# EAGLE board stencil2 (EAGLE 9.6.2), part 1 of 4
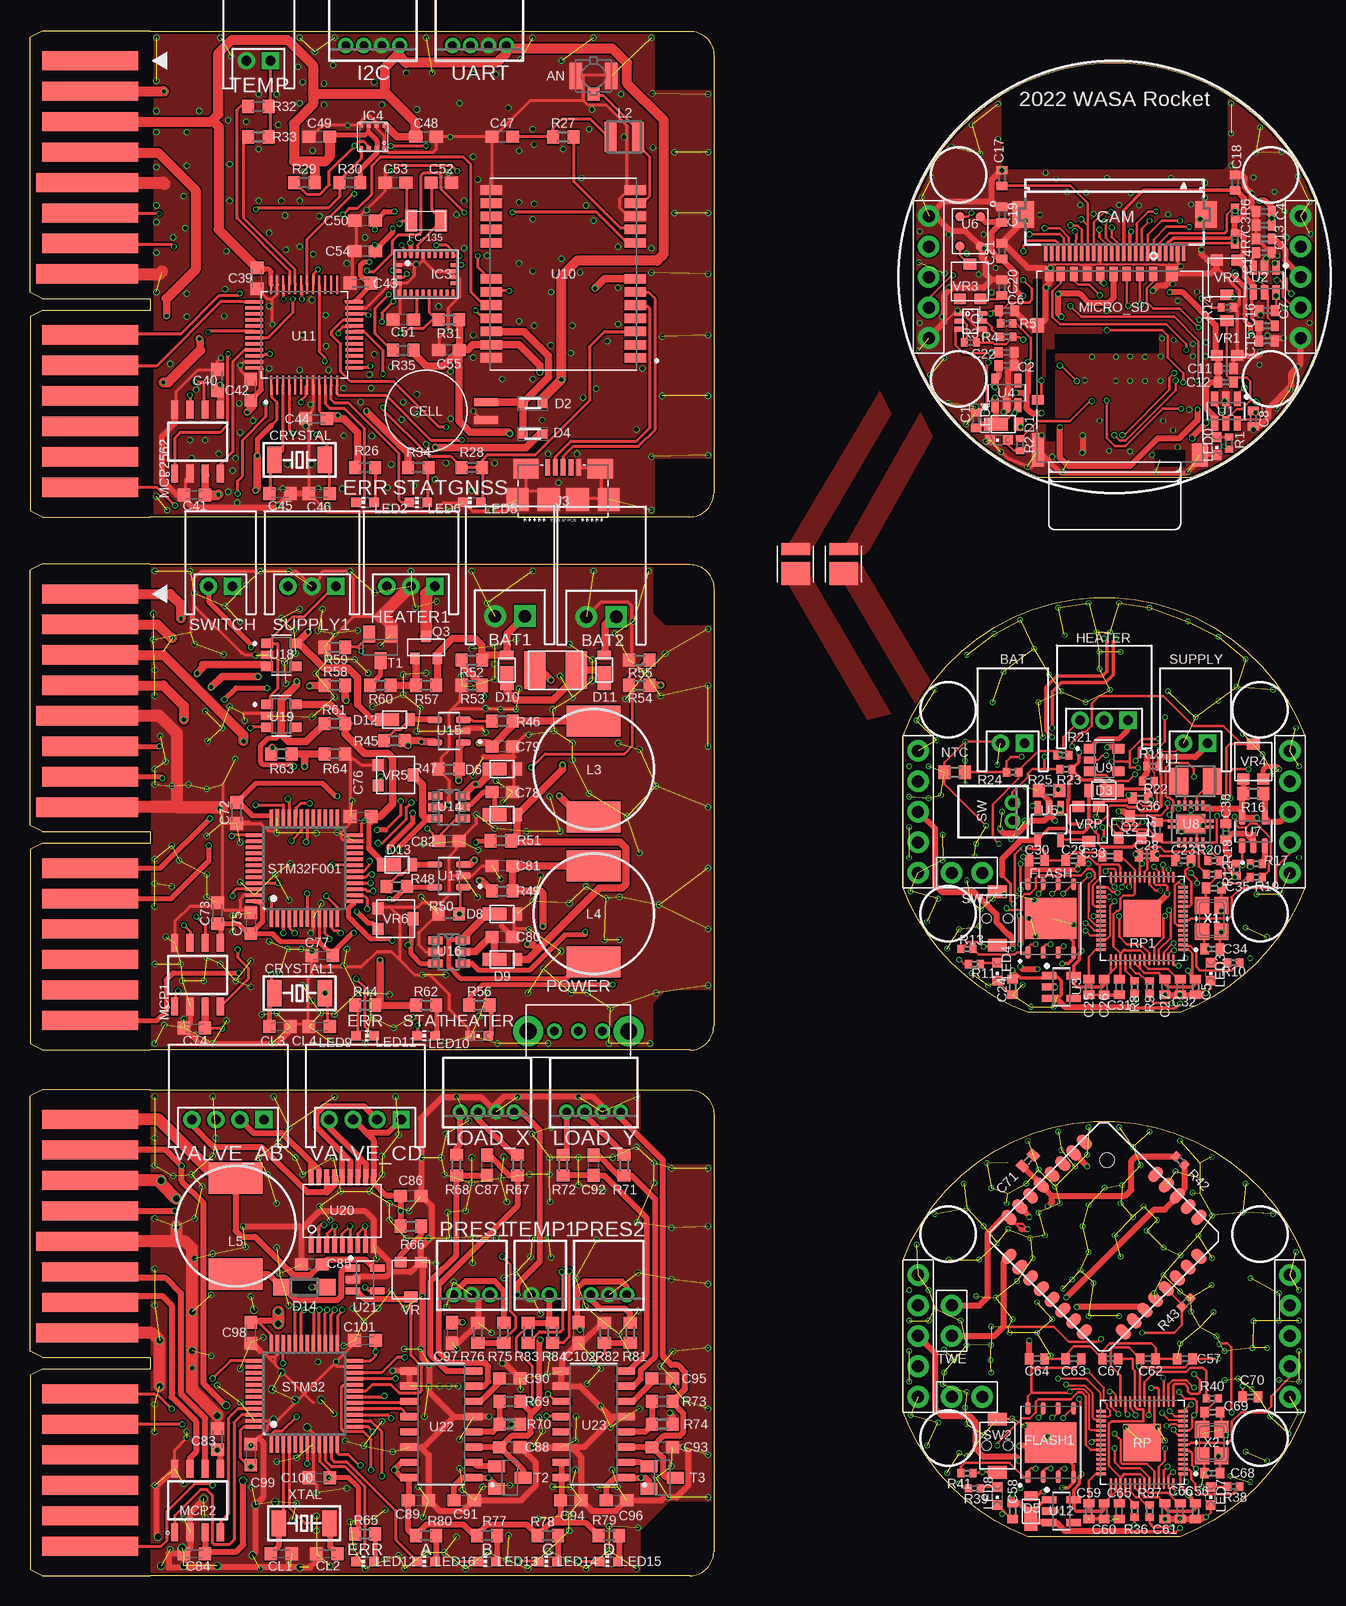
[diagram p0: board, top side]
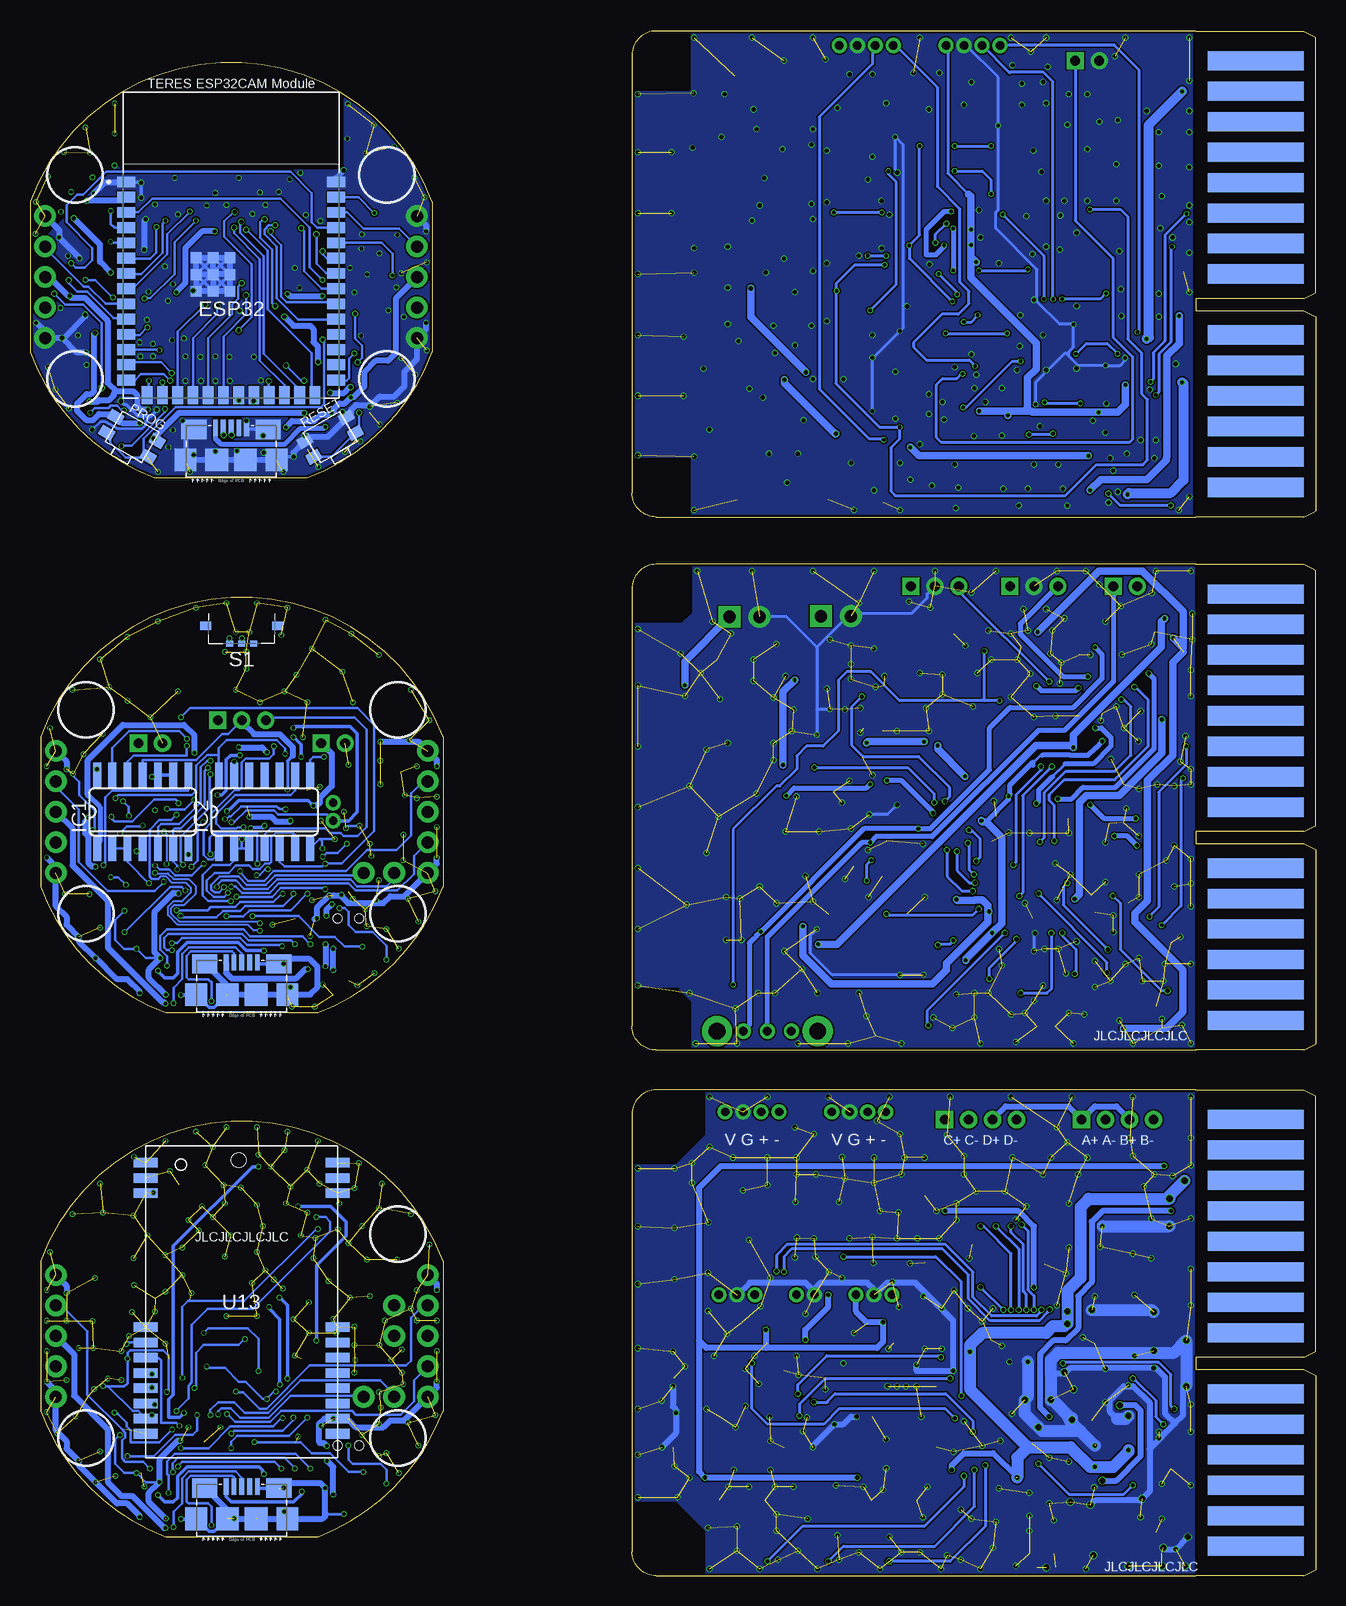
[diagram p1: board, bottom side, seen from below]

Size 107.19 x 128.76 mm. Coordinates in mm from the lower left corner, seen from the top.
Outline: 10,128.76 55,128.76 arc-90 57,126.77 57,90.27 arc-90 55,88.27 10,88.27
Outline: 10,84.31 55,84.31 arc-90 57,82.31 57,45.81 arc-90 55,43.81 10,43.81
Outline: 10,40.5 55,40.5 arc-90 57,38.5 57,2 arc-90 55,0 10,0
Outline: 107.19,114.54 107.19,101.99 arc-49 96.77,91.52 84.07,91.52 arc-49 73.66,101.99 73.66,114.54 arc-139 107.19,114.54
Outline: 106.3,69.96 106.3,57.41 arc-49 95.89,46.95 83.19,46.95 arc-49 72.77,57.41 72.77,69.96 arc-139 106.3,69.96
Outline: 106.3,26.27 106.3,13.72 arc-49 95.89,3.26 83.19,3.26 arc-49 72.77,13.72 72.77,26.27 arc-139 106.3,26.27
Copper layers (1*16): Top 0.035mm / dielectric 1.6mm / Bottom 0.035mm
Design rules "jlcpcb-2layers_": minimum track width 5mil, minimum drill 0.3mm, track to track 5mil, track to pad 5mil, pad to pad 5mil, via to via 5mil, smd to smd 5mil, copper to edge 0.2mm, drill to drill 6mil, minimum pad ring 10mil, minimum via ring 3mil, stop-mask expansion 4mil, vias tented up to drill 100mil, thermal gap 10mil

## Footprints (pad centres in the part's own frame; a part is rotated, then mirrored left to right if it is on the bottom)
S4B-PH-K-S = drill 0.8 square: 1 3,0 | drill 0.8: 2 1,0; 3 -1,0; 4 -3,0
U.FL_SMT = smd 1.05 x 2.2: GND1 -1.475,0; GND2 1.475,0 | smd 1 x 1.05: SIG 0,-1.525
S2B-PH-K-S = drill 0.8 square: 1 1,0 | drill 0.8: 2 -1,0
S2B-XH-A = drill 1.016 square: 1 1.25,0 | drill 1.016: 2 -1.25,0
P5_2.54 = drill 1: 1 0,5.08; 2 0,2.54; 3 0,0; 4 0,-2.54; 5 0,-5.08
C0402 = smd 0.7 x 0.9: 1 -0.65,0; 2 0.65,0
C0603K = smd 1.05 x 1.08: 1 -0.875,0; 2 0.875,0
C0603 = smd 1.1 x 1: 1 -0.85,0; 2 0.85,0
FH12-24S-0.5SH = smd 0.3 x 1.3: 1 -5.75,3.25; 2 -5.25,3.25; 3 -4.75,3.25; 4 -4.25,3.25; 5 -3.75,3.25; 6 -3.25,3.25; 7 -2.75,3.25; 8 -2.25,3.25; 9 -1.75,3.25; 10 -1.25,3.25; 11 -0.75,3.25; 12 -0.25,3.25; 13 0.25,3.25; 14 0.75,3.25; 15 1.25,3.25; 16 1.75,3.25; 17 2.25,3.25; 18 2.75,3.25; 19 3.25,3.25; 20 3.75,3.25; 21 4.25,3.25; 22 4.75,3.25; 23 5.25,3.25; 24 5.75,3.25 | smd 1.8 x 2.2: PAD1 -7.62,0; PAD2 7.62,0
DC,DCK = smd 0.7 x 2: + 0.75,-5; - -0.75,-5
FC-255 = smd 1.2 x 2.2: 1 -2.1,0; 2 2.1,0
CUHS20S30 = smd 0.8 x 1.1: A 1.25,0 | smd 2 x 1.1: C -0.65,0
SODFL1608X70N = smd 0.769 x 0.776: 1 -0.8,0; 2 0.8,0
SOD123 = smd 1.4 x 1.4: A 1.9,0; C -1.9,0
XCVR_ESP32-S3-WROOM-1-N16R2 = smd 1.5 x 0.9: 1 -8.75,5.26; 2 -8.75,3.99; 3 -8.75,2.72; 4 -8.75,1.45; 5 -8.75,0.18; 6 -8.75,-1.09; 7 -8.75,-2.36; 8 -8.75,-3.63; 9 -8.75,-4.9; 10 -8.75,-6.17; 11 -8.75,-7.44; 12 -8.75,-8.71; 13 -8.75,-9.98; 14 -8.75,-11.25; 27 8.75,-11.25; 28 8.75,-9.98; 29 8.75,-8.71; 30 8.75,-7.44; 31 8.75,-6.17; 32 8.75,-4.9; 33 8.75,-3.63; 34 8.75,-2.36; 35 8.75,-1.09; 36 8.75,0.18; 37 8.75,1.45; 38 8.75,2.72; 39 8.75,3.99; 40 8.75,5.26 | smd 0.9 x 1.5: 15 -6.985,-12.5; 16 -5.715,-12.5; 17 -4.445,-12.5; 18 -3.175,-12.5; 19 -1.905,-12.5; 20 -0.635,-12.5; 21 0.635,-12.5; 22 1.905,-12.5; 23 3.175,-12.5; 24 4.445,-12.5; 25 5.715,-12.5; 26 6.985,-12.5 | smd 0.9 x 0.9: 41_1 -1.5,-2.46; 41_2 -2.9,-2.46; 41_3 -0.1,-2.46; 41_4 -2.9,-3.86; 41_5 -1.5,-3.86; 41_6 -0.1,-3.86; 41_7 -2.9,-1.06; 41_8 -1.5,-1.06; 41_9 -0.1,-1.06
FC-135 = smd 1 x 1.8: P$1 0,0; P$2 2.5,0
SON127P600X500X80-9N = smd 1.04 x 0.44: 1 -2.845,1.905; 2 -2.845,0.635; 3 -2.845,-0.635; 4 -2.845,-1.905; 5 2.845,-1.905; 6 2.845,-0.635; 7 2.845,0.635; 8 2.845,1.905 | smd 3.4 x 4.3: 9 0,0
S3B-PH-K-S = drill 0.8 square: 1 2,0 | drill 0.8: 2 0,0; 3 -2,0
S4B-ZR = drill 0.7 pad 1.1: 1 -2.25,0; 2 -0.75,0; 3 0.75,0; 4 2.25,0
SO14 = smd 0.66 x 2.032: 1 -3.81,-3.073; 2 -2.54,-3.073; 3 -1.27,-3.073; 4 0,-3.073; 5 1.27,-3.073; 6 2.54,-3.073; 7 3.81,-3.073; 8 3.81,3.073; 9 2.54,3.073; 10 1.27,3.073; 11 0,3.073; 12 -1.27,3.073; 13 -2.54,3.073; 14 -3.81,3.073
LGA-28_3.80X5.20/0.5 = smd 0.3 x 0.5: 1 -2.25,1.56; 6 -2.25,-1.56; 7 -1.75,-1.56; 8 -1.25,-1.56; 9 -0.75,-1.56; 10 -0.25,-1.56; 11 0.25,-1.56; 12 0.75,-1.56; 13 1.25,-1.56; 14 1.75,-1.56; 15 2.25,-1.56; 20 2.25,1.56; 21 1.75,1.56; 22 1.25,1.56; 23 0.75,1.56; 24 0.25,1.56; 25 -0.25,1.56; 26 -0.75,1.56; 27 -1.25,1.56; 28 -1.75,1.56 | smd 0.5 x 0.3: 2 -2.25,0.75; 3 -2.25,0.25; 4 -2.25,-0.25; 5 -2.25,-0.75; 16 2.25,-0.75; 17 2.25,-0.25; 18 2.25,0.25; 19 2.25,0.75
BME280 = smd 0.35 x 0.5: 1 0.975,-1.025; 2 0.325,-1.025; 3 -0.325,-1.025; 4 -0.975,-1.025; 5 -0.975,1.025; 6 -0.325,1.025; 7 0.325,1.025; 8 0.975,1.025
GHI-CONNECTORS_10118192-0001LF(MICRO-USB-B-AMPHENOL-FCI) = smd 1.8 x 1.9: CGND1 -3.8,0; CGND4 3.8,0 | smd 1.9 x 1.9: CGND2 -1.2,0; CGND3 1.2,0 | smd 2.1 x 1.6: CGND5 3.1,2.55; CGND6 -3.1,2.55 | smd 0.4 x 1.35: D+ 0,2.675; D- -0.65,2.675; GND 1.3,2.675; ID 0.65,2.675; VBUS -1.3,2.675
L3225M = smd 1.6 x 2.2: 1 -1.4,0; 2 1.4,0
SM-NE29 = smd 1 x 2.54: 1 -1.15,0; 2 1.15,0
NR10050 = smd 2.6 x 4.5: 1 -4,0; 2 4,0
CHIPLED_0603 = smd 0.8 x 0.8: A 0,-0.75; C 0,0.75
CHIP-LED0603 = smd 0.8 x 0.8: A 0,-0.75; C 0,0.75
SOIC127P600X175-8N = smd 1.5 x 0.6: 1 -2.65,1.905; 2 -2.65,0.635; 3 -2.65,-0.635; 4 -2.65,-1.905; 5 2.65,-1.905; 6 2.65,-0.635; 7 2.65,0.635; 8 2.65,1.905
HRS_DM3AT-SF-PEJM5 = smd 0.7 x 1.2: 1 3.2,0; 2 2.1,0; 3 1,0; 4 -0.1,0; 5 -1.2,0; 6 -2.3,0; 7 -3.4,0; 8 -4.5,0; SWB -5.45,0 | smd 1 x 1.2: P1 -6.4,-4.3; P4 4.75,0 | smd 1 x 2.8: P2 -6.4,-14.65 | smd 1.3 x 1.9: P3 7.1,-15.1 | smd 1 x 0.8: SWA -6.4,-10.5
R0603 = smd 1 x 1.1: 1 -0.85,0; 2 0.85,0
SK-12D01-VG4 = drill 1.4 pad 1.93: 1 -4.2,0; 2 4.2,0 | drill 0.7: A -2,0; B 2,0; C 0,0
S3B-ZR = drill 0.7 pad 1.1: 1 -1.5,0; 2 0,0; 3 1.5,0
THAF01-NC-R = smd 1.2 x 0.9: 1 -2,0.75; 2 2,0.75; 3 -2,-0.75; 4 2,-0.75
SOT-363 = smd 0.4 x 0.8: 1 -0.65,-0.95; 2 0,-0.95; 3 0.65,-0.95; 4 0.65,0.95; 5 0,0.95; 6 -0.65,0.95
SOT-23 = smd 0.802 x 0.972: P1 -0.95,-0.917; P2 0.95,-0.917; P3 0,0.917
R0402 = smd 0.6 x 0.7: 1 -0.5,0; 2 0.5,0
QFN40P700X700X90-57N = smd 0.84 x 0.2: 1 -3.435,2.6; 2 -3.435,2.2; 3 -3.435,1.8; 4 -3.435,1.4; 5 -3.435,1; 6 -3.435,0.6; 7 -3.435,0.2; 8 -3.435,-0.2; 9 -3.435,-0.6; 10 -3.435,-1; 11 -3.435,-1.4; 12 -3.435,-1.8; 13 -3.435,-2.2; 14 -3.435,-2.6; 29 3.435,-2.6; 30 3.435,-2.2; 31 3.435,-1.8; 32 3.435,-1.4; 33 3.435,-1; 34 3.435,-0.6; 35 3.435,-0.2; 36 3.435,0.2; 37 3.435,0.6; 38 3.435,1; 39 3.435,1.4; 40 3.435,1.8; 41 3.435,2.2; 42 3.435,2.6 | smd 0.2 x 0.84: 15 -2.6,-3.435; 16 -2.2,-3.435; 17 -1.8,-3.435; 18 -1.4,-3.435; 19 -1,-3.435; 20 -0.6,-3.435; 21 -0.2,-3.435; 22 0.2,-3.435; 23 0.6,-3.435; 24 1,-3.435; 25 1.4,-3.435; 26 1.8,-3.435; 27 2.2,-3.435; 28 2.6,-3.435; 43 2.6,3.435; 44 2.2,3.435; 45 1.8,3.435; 46 1.4,3.435; 47 1,3.435; 48 0.6,3.435; 49 0.2,3.435; 50 -0.2,3.435; 51 -0.6,3.435; 52 -1,3.435; 53 -1.4,3.435; 54 -1.8,3.435; 55 -2.2,3.435; 56 -2.6,3.435 | smd 3.1 x 3.1: 57 0,0
SSAJ120100 = smd 0.6 x 0.51: 1 -1,2.5; 2 1,2.5; C 0,2.5 | smd 0.9 x 0.7: GND@1 -3,1; GND@2 3,1
LQFP48 = smd 1.5 x 0.3: 1 -4.15,2.75; 2 -4.15,2.25; 3 -4.15,1.75; 4 -4.15,1.25; 5 -4.15,0.75; 6 -4.15,0.25; 7 -4.15,-0.25; 8 -4.15,-0.75; 9 -4.15,-1.25; 10 -4.15,-1.75; 11 -4.15,-2.25; 12 -4.15,-2.75; 25 4.15,-2.75; 26 4.15,-2.25; 27 4.15,-1.75; 28 4.15,-1.25; 29 4.15,-0.75; 30 4.15,-0.25; 31 4.15,0.25; 32 4.15,0.75; 33 4.15,1.25; 34 4.15,1.75; 35 4.15,2.25; 36 4.15,2.75 | smd 0.3 x 1.5: 13 -2.75,-4.15; 14 -2.25,-4.15; 15 -1.75,-4.15; 16 -1.25,-4.15; 17 -0.75,-4.15; 18 -0.25,-4.15; 19 0.25,-4.15; 20 0.75,-4.15; 21 1.25,-4.15; 22 1.75,-4.15; 23 2.25,-4.15; 24 2.75,-4.15; 37 2.75,4.15; 38 2.25,4.15; 39 1.75,4.15; 40 1.25,4.15; 41 0.75,4.15; 42 0.25,4.15; 43 -0.25,4.15; 44 -0.75,4.15; 45 -1.25,4.15; 46 -1.75,4.15; 47 -2.25,4.15; 48 -2.75,4.15
S2B-ZR = drill 0.7 pad 1.1: 1 -0.75,0; 2 0.75,0
TVAF06-A020B-R = smd 1.6 x 1.05: P$1 0,2.225; P$2 0,-2.225 | hole 0.75: -0.9,0; 0.9,0
SOT23-EBC = smd 1 x 1.4: B 0.95,-1.1; C 0,1.1; E -0.95,-1.1
SOT23-BEC = smd 1 x 1.4: B -0.95,-1.1; C 0,1.1; E 0.95,-1.1
P2_2.54 = drill 1: P$1 0,1.27; P$2 0,-1.27
SOT95P240X110-6N = smd 1.18 x 0.609: 1 -1.024,0.95; 2 -1.024,0; 3 -1.024,-0.95; 4 1.024,-0.95; 5 1.024,0; 6 1.024,0.95
SOT95P240X110-5N = smd 1.18 x 0.609: 1 -1.024,0.95; 2 -1.024,0; 3 -1.024,-0.95; 4 1.024,-0.95; 5 1.024,0.95
SOT23-5L = smd 0.533 x 1.2: 1 -0.95,-1.3; 2 0,-1.3; 3 0.95,-1.3 | smd 0.55 x 1.2: 4 0.95,1.3; 5 -0.95,1.3
SPU0414HR5H-SB = smd 0.8 x 0.8: 1 0.85,1.23; 2 0.85,-1.23; 3 -0.85,-1.23; 4 -0.85,1.23
SOT95P280X100-5N_LT6106CS5#PBF = smd 1.24 x 0.55: 1 -1.185,0.95; 2 -1.185,0; 3 -1.185,-0.95; 4 1.185,-0.95; 5 1.185,0.95
10-VFDFN = smd 0.85 x 0.28: 1 -1.55,1; 2 -1.55,0.5; 3 -1.55,0; 4 -1.55,-0.5; 5 -1.55,-1; 6 1.55,-1; 7 1.55,-0.5; 8 1.55,0; 9 1.55,0.5; 10 1.55,1 | smd 1.65 x 2.4: P$1 0,0 | smd 0.28 x 0.7: P$2 -0.25,1.55; P$3 0.25,1.55; P$4 -0.25,-1.55; P$5 0.25,-1.55
IC_TCK106AF,LF = smd 1 x 0.8: 1 -1.2,0.95; 3 -1.2,-0.95; 4 1.2,-0.95; 5 1.2,0.95 | smd 1 x 0.6: 2 -1.2,0
XCVR_NEO-M9N-00B = smd 1.8 x 0.8: 1 -6,7; 2 -6,5.9; 3 -6,4.8; 4 -6,3.7; 5 -6,2.6; 6 -6,1.5; 7 -6,0.4; 8 -6,-2.6; 9 -6,-3.7; 10 -6,-4.8; 11 -6,-5.9; 12 -6,-7; 13 6,-7; 14 6,-5.9; 15 6,-4.8; 16 6,-3.7; 17 6,-2.6; 18 6,0.4; 19 6,1.5; 20 6,2.6; 21 6,3.7; 22 6,4.8; 23 6,5.9; 24 6,7
QFP50P900X900X160-48N = smd 1.56 x 0.28: 1 -4.18,2.75; 2 -4.18,2.25; 3 -4.18,1.75; 4 -4.18,1.25; 5 -4.18,0.75; 6 -4.18,0.25; 7 -4.18,-0.25; 8 -4.18,-0.75; 9 -4.18,-1.25; 10 -4.18,-1.75; 11 -4.18,-2.25; 12 -4.18,-2.75; 25 4.18,-2.75; 26 4.18,-2.25; 27 4.18,-1.75; 28 4.18,-1.25; 29 4.18,-0.75; 30 4.18,-0.25; 31 4.18,0.25; 32 4.18,0.75; 33 4.18,1.25; 34 4.18,1.75; 35 4.18,2.25; 36 4.18,2.75 | smd 0.28 x 1.56: 13 -2.75,-4.18; 14 -2.25,-4.18; 15 -1.75,-4.18; 16 -1.25,-4.18; 17 -0.75,-4.18; 18 -0.25,-4.18; 19 0.25,-4.18; 20 0.75,-4.18; 21 1.25,-4.18; 22 1.75,-4.18; 23 2.25,-4.18; 24 2.75,-4.18; 37 2.75,4.18; 38 2.25,4.18; 39 1.75,4.18; 40 1.25,4.18; 41 0.75,4.18; 42 0.25,4.18; 43 -0.25,4.18; 44 -0.75,4.18; 45 -1.25,4.18; 46 -1.75,4.18; 47 -2.25,4.18; 48 -2.75,4.18
E220-900T22S = smd 2 x 0.8: P1 8,-11.6; P2 8,-10.33; P3 8,-9.06; P4 8,2.11; P5 8,3.38; P6 8,4.65; P7 8,5.92; P8 8,7.19; P9 8,8.46; P10 8,9.73; P11 8,11; P12 -8,11; P13 -8,9.73; P14 -8,8.46; P15 -8,7.19; P16 -8,5.92; P17 -8,4.65; P18 -8,3.38; P19 -8,2.11; P20 -8,-9.06; P21 -8,-10.33; P22 -8,-11.6
SOT-6_S = smd 1.219 x 0.66: 1 -1.143,0.95; 2 -1.143,0; 3 -1.143,-0.95; 4 1.143,-0.95; 5 1.143,0; 6 1.143,0.95
SSOP18-P-225-0.65 = smd 1.35 x 0.4: P1 -2.8,2.6; P2 -2.8,1.95; P3 -2.8,1.3; P4 -2.8,0.65; P5 -2.8,0; P6 -2.8,-0.65; P7 -2.8,-1.3; P8 -2.8,-1.95; P9 -2.8,-2.6; P10 2.8,-2.6; P11 2.8,-1.95; P12 2.8,-1.3; P13 2.8,-0.65; P14 2.8,0; P15 2.8,0.65; P16 2.8,1.3; P17 2.8,1.95; P18 2.8,2.6
SOP127P600X180-16N = smd 1.58 x 0.59: 1 -2.67,4.445; 2 -2.67,3.175; 3 -2.67,1.905; 4 -2.67,0.635; 5 -2.67,-0.635; 6 -2.67,-1.905; 7 -2.67,-3.175; 8 -2.67,-4.445; 9 2.67,-4.445; 10 2.67,-3.175; 11 2.67,-1.905; 12 2.67,-0.635; 13 2.67,0.635; 14 2.67,1.905; 15 2.67,3.175; 16 2.67,4.445
EDGE30 = smd 1.6 x 8: 1 -17.78,-5; 2 -15.24,-5; 3 -12.7,-5; 4 -10.16,-5; 6 -5.08,-5; 7 -2.54,-5; 10 5.08,-5; 11 7.62,-5; 12 10.16,-5; 13 12.7,-5; 14 15.24,-5; 15 17.78,-5 | smd 1.6 x 8.5: 5 -7.62,-5.25; 8 0,-5.25 | smd 1.6 x 8 bottom: 16 -17.78,-5; 17 -15.24,-5; 18 -12.7,-5; 19 -10.16,-5; 20 -7.62,-5; 21 -5.08,-5; 22 -2.54,-5; 23 0,-5; 25 5.08,-5; 26 7.62,-5; 27 10.16,-5; 28 12.7,-5; 29 15.24,-5; 30 17.78,-5
S1S0-3030XX9506 = smd 1.01 x 2.37: A 1.245,0 | smd 1.93 x 2.37: C -0.785,0
LITE = smd 1.4 x 0.9: 1 0.25,11.43; 2 0.25,10.16; 3 0.25,8.89; 4 0.25,7.62; 5 0.25,6.35; 6 0.25,5.08; 7 0.25,3.81; 8 0.25,2.54; 17 13.72,2.54; 18 13.72,3.81; 19 13.72,5.08; 20 13.72,6.35; 21 13.72,7.62; 22 13.72,8.89; 23 13.72,10.16; 24 13.72,11.43 | smd 0.9 x 1.4: 9 2.54,0.25; 10 3.81,0.25; 11 5.08,0.25; 12 6.35,0.25; 13 7.62,0.25; 14 8.89,0.25; 15 10.16,0.25; 16 11.43,0.25; 25 11.43,13.72; 26 10.16,13.72; 27 8.89,13.72; 28 7.62,13.72; 29 6.35,13.72 | hole 1.2: 2.65,11.7
SMD1812P = smd 1.78 x 3.15: 1 -1.725,0; 2 1.725,0
PVZ3A = smd 1 x 0.9: 1 -0.85,-1.45; 3 0.85,-1.45 | smd 1.1 x 0.9: 2 0,1.45
FA-238 = smd 1.4 x 1.2: 1 -1.1,-0.8; 2 1.1,-0.8; 3 1.1,0.8; 4 -1.1,0.8

## Placement (x,y rotation side)
AB  [S4B-PH-K-S]  16.51,38.03 0 top
AN  U.FL-R-SMT  [U.FL_SMT]  46.99,125.02 0 top
BAT  [S2B-PH-K-S]  81.91,69.4 0 top
BAT1  [S2B-XH-A]  40,79.99 0 top
BAT2  [S2B-XH-A]  47.62,79.94 0 top
BOTTOM  P5_2.54  [P5_2.54]  105.03,63.68 0 top
BOTTOM1  P5_2.54  [P5_2.54]  105.03,20 0 top
C1  0.1µF  [C0402]  78.87,96.32 90 top
C2  10µF  [C0402]  81.41,100.89 0 top
C3  22µF  [C0402]  102.87,112.58 180 top
C4  0.1µF  [C0402]  102.87,113.72 180 top
C5  0.1µ  [C0402]  97.16,49.08 270 top
C6  0.1µF  [C0402]  81.42,105.47 0 top
C7  0.1µF  [C0402]  103.12,105.47 180 top
C8  0.01µF  [C0402]  101.98,96.45 270 top
C9  P5_2.54  [P5_2.54]  74.92,108.26 0 top
C10  P5_2.54  [P5_2.54]  105.92,108.26 0 top
C11  2.2µF  [C0402]  99.69,100.64 0 top
C12  100pF  [C0402]  99.69,99.5 0 top
C13  0.1µF  [C0402]  102.87,111.44 180 top
C14  0.01µF  [C0402]  102.87,110.29 0 top
C15  1.0µF  [C0402]  103.12,102.93 0 top
C16  100pF  [C0402]  103.12,104.2 0 top
C17  15pF  [C0402]  81.03,116.52 90 top
C18  0.1µF  [C0402]  100.46,116.13 90 top
C19  0.1µF  [C0402]  81.03,113.47 90 top
C20  2.2µF  [C0402]  81.03,107.37 90 top
C21  10µF  [C0402]  81.03,110.42 90 top
C22  1µF  [C0402]  81.41,101.97 0 top
C23  0.1µ  [C0402]  96.14,59.62 180 top
C24  0.1µF  [C0402]  81.91,49.08 270 top
C25  10µF  [C0402]  88.27,49.08 270 top
C26  1µ  [C0402]  89.53,49.08 270 top
C27  0.1µ  [C0402]  94.61,49.08 270 top
C28  0.1µ  [C0402]  93.09,60 0 top
C29  0.1µ  [C0402]  87,59.62 180 top
C30  10µF  [C0402]  83.95,59.62 0 top
C31  1µ  [C0402]  90.8,49.08 270 top
C32  0.1µ  [C0402]  95.89,49.08 270 top
C33  0.1µ  [C0402]  90.04,60 180 top
C34  10p  [C0402]  98.55,52.25 180 top
C35  10p  [C0402]  98.68,57.32 0 top
C36  10µF  [C0402]  92.58,64.83 180 top
C37  0.1µF  [C0402]  93.98,62.16 90 top
C38  10µF  [C0402]  99.69,62.03 270 top
C39  [C0603K]  18.92,108.13 270 top
C40  [C0603K]  15.63,99.67 90 top
C41  [C0603K]  13.72,90.1 180 top
C42  [C0603K]  18.41,98.86 90 top
C43  [C0603K]  27.56,107.75 180 top
C44  [C0603K]  23.88,96.45 180 top
C45  15pF  [C0603K]  20.83,90.23 180 top
C46  15pF  [C0603K]  24.13,90.23 0 top
C47  47pF  [C0603]  39.37,119.94 180 top
C48  0.1µ  [C0603]  33.02,119.94 0 top
C49  0.1µ  [C0603]  24.13,119.94 180 top
C50  0.1µ  [C0603]  27.94,112.96 180 top
C51  0.1µ  [C0603]  31.12,104.7 180 top
C52  [C0603]  34.29,116.13 180 top
C53  [C0603]  30.48,116.13 0 top
C54  0.1µF  [C0603]  27.94,110.42 180 top
C55  0.1µ  [C0603]  34.92,102.16 180 top
C56  0.1µ  [C0402]  97.16,5.39 270 top
C57  0.1µ  [C0402]  96.27,18.09 180 top
C58  0.1µF  [C0402]  81.91,5.39 270 top
C59  10µF  [C0402]  88.27,5.39 270 top
C60  1µ  [C0402]  89.53,5.39 270 top
C61  0.1µ  [C0402]  94.61,5.39 270 top
C62  0.1µ  [C0402]  93.19,18.09 0 top
C63  0.1µ  [C0402]  87,18.09 180 top
C64  0.1μ  [C0402]  83.95,18.09 0 top
C65  1µ  [C0402]  90.8,5.39 270 top
C66  1μ  [C0402]  95.89,5.39 270 top
C67  1μ  [C0402]  90.04,18.09 180 top
C68  0.1μ  [C0402]  98.55,8.57 180 top
C69  0.1μ  [C0402]  98.55,13.65 0 top
C70  0.1µ  [C0402]  101.73,14.92 0 top
C71  0.1µ  [C0402]  83.19,34.6 45 top
C72  [C0603K]  17.22,63.58 270 top
C73  [C0603K]  15.63,55.22 90 top
C74  [C0603K]  13.72,45.65 180 top
C75  [C0603K]  18.41,54.41 90 top
C76  [C0603K]  27.56,63.3 180 top
C77  [C0603K]  24.38,51.7 180 top
C78  47µF  [C0603]  39.37,65.33 0 top
C79  47µF  [C0603]  39.37,69.14 0 top
C80  47µF  [C0603]  39.37,53.27 0 top
C81  47µF  [C0603]  39.37,59.18 180 top
C82  0.1µF  [C0603]  34.92,61.27 0 top
C83  [C0603K]  15.63,11.41 90 top
C84  [C0603K]  13.72,1.83 180 top
C85  4.7µF  [C0603]  23.49,25.97 180 top
C86  2.2µF  [C0603]  31.75,31.68 0 top
C87  0.1µF  [C0603]  38.1,34.22 90 top
C88  10µF  [C0603]  40,10.72 0 top
C89  0.1µF  [C0603]  32.38,6.28 0 top
C90  0.1µF  [C0603]  40,16.44 0 top
C91  10µF  [C0603]  36.2,6.28 0 top
C92  0.1µF  [C0603]  46.99,34.22 90 top
C93  10µF  [C0603]  52.7,10.72 0 top
C94  0.1µF  [C0603]  45.09,6.28 0 top
C95  0.1µF  [C0603]  52.7,16.44 0 top
C96  10µF  [C0603]  48.89,6.28 0 top
C97  [C0603]  35.18,20.25 270 top
C98  [C0603K]  18.41,20.25 270 top
C99  [C0603K]  18.41,10.09 90 top
C100  [C0603K]  24.13,8.19 180 top
C101  [C0603K]  27.94,19.61 180 top
C102  [C0603]  45.72,20.25 270 top
CAM  OV2640_FPC_INV  [FH12-24S-0.5SH]  90.42,113.47 180 top
CD  [S4B-PH-K-S]  27.94,38.03 0 top
CELL  DCK-3R3E  [DC,DCK]  33.02,97.08 90 top
CL1  15pF  [C0603K]  20.95,1.83 180 top
CL2  15pF  [C0603K]  24.77,1.83 0 top
CL3  15pF  [C0603K]  20.83,45.78 180 top
CL4  15pF  [C0603K]  24.13,45.78 0 top
CRYSTAL  32.768kHz  [FC-255]  22.48,93.02 180 top
CRYSTAL1  32.768kHz  [FC-255]  22.48,48.57 180 top
D1  CUHS20S30  [CUHS20S30]  81.15,96.01 0 top
D2  RB521S-30TE61  [SODFL1608X70N]  41.91,97.72 0 top
D3  CUHS20S30  [CUHS20S30]  89.53,65.46 180 top
D4  RB521S-30TE61  [SODFL1608X70N]  41.91,95.18 0 top
D5  CUHS20S30  [CUHS20S30]  83.44,5.39 90 top
D6  CUHS20S30  [CUHS20S30]  39.37,67.24 0 top
D7  CUHS20S30  [CUHS20S30]  39.37,63.43 0 top
D8  CUHS20S30  [CUHS20S30]  39.37,55.17 0 top
D9  CUHS20S30  [CUHS20S30]  39.37,51.36 0 top
D10  CUHS20S30  [CUHS20S30]  39.75,75.5 90 top
D11  CUHS20S30  [CUHS20S30]  47.88,75.5 90 top
D12  CUHS20S30  [CUHS20S30]  30.4,71.36 0 top
D13  CUHS20S30  [CUHS20S30]  30.6,59.26 0 top
D14  [SOD123]  22.86,24.06 180 top
ESP32  ESP32-S3-WROOM-1-N16R2  [XCVR_ESP32-S3-WROOM-1-N16R2]  90.42,110.93 0 bottom
FC-135  FC-135  [FC-135]  34.29,112.96 180 top
FLASH  W25Q32JVZPIQ  [SON127P600X500X80-9N]  85.09,54.79 90 top
FLASH1  W25Q32JVZPIQ  [SON127P600X500X80-9N]  85.09,11.11 90 top
HEATER  [S3B-PH-K-S]  89.53,71.3 0 top
HEATER1  [S3B-PH-K-S]  31.75,82.48 0 top
I2C  S4B-ZR  [S4B-ZR]  28.58,127.56 180 top
IC1  4066D  [SO14]  97.79,63.68 0 bottom
IC2  4066D  [SO14]  87.63,63.68 0 bottom
IC3  BN055  [LGA-28_3.80X5.20/0.5]  33.02,108.52 0 top
IC4  BME280  [BME280]  28.58,119.94 0 top
J1  MICRO_USB_B_HIROSE_ZX62-B-5PA(11)MODEL  [GHI-CONNECTORS_10118192-0001LF(MICRO-USB-B-AMPHENOL-FCI)]  90.42,93.02 0 bottom
J2  MICRO_USB_B_HIROSE_ZX62-B-5PA(11)MODEL  [GHI-CONNECTORS_10118192-0001LF(MICRO-USB-B-AMPHENOL-FCI)]  89.53,48.44 0 bottom
J3  MICRO_USB_B_HIROSE_ZX62-B-5PA(11)MODEL  [GHI-CONNECTORS_10118192-0001LF(MICRO-USB-B-AMPHENOL-FCI)]  44.45,89.72 0 top
J4  MICRO_USB_B_HIROSE_ZX62-B-5PA(11)MODEL  [GHI-CONNECTORS_10118192-0001LF(MICRO-USB-B-AMPHENOL-FCI)]  89.53,4.76 0 bottom
L1  4.7µH  [L3225M]  97.16,66.22 0 top
L2  33Ω  [SM-NE29]  49.53,119.94 0 top
L3  22µH  [NR10050]  46.99,67.24 90 top
L4  22µH  [NR10050]  46.99,55.17 90 top
L5  10µH  [NR10050]  17.14,29.14 270 top
LED0  [CHIPLED_0603]  98.93,94.16 180 top
LED1  [CHIPLED_0603]  80.77,94.67 90 top
LED2  [CHIP-LED0603]  27.94,89.47 90 top
LED3  [CHIPLED_0603]  98.42,50.35 180 top
LED4  [CHIPLED_0603]  80.64,50.35 180 top
LED5  [CHIP-LED0603]  36.83,89.47 90 top
LED6  [CHIP-LED0603]  32.38,89.47 90 top
LED7  [CHIPLED_0603]  98.42,6.66 180 top
LED8  [CHIPLED_0603]  80.64,6.66 180 top
LED9  [CHIP-LED0603]  27.94,45.02 270 top
LED10  [CHIPLED_0603]  37.46,45.02 90 top
LED11  [CHIP-LED0603]  33.02,45.02 90 top
LED12  [CHIP-LED0603]  27.94,1.2 90 top
LED13  [CHIP-LED0603]  38.1,1.2 90 top
LED14  [CHIP-LED0603]  43.18,1.2 90 top
LED15  [CHIP-LED0603]  48.26,1.2 90 top
LED16  [CHIP-LED0603]  33.02,1.2 90 top
LOAD_X  S4B-ZR  [S4B-ZR]  38.1,38.66 180 top
LOAD_Y  S4B-ZR  [S4B-ZR]  46.99,38.66 180 top
MCP1  MCP2562-E/SN  [SOIC127P600X175-8N]  13.97,50.09 90 top
MCP2  MCP2562-E/SN  [SOIC127P600X175-8N]  13.97,6.28 90 top
MCP2562  MCP2562-E/SN  [SOIC127P600X175-8N]  13.97,94.55 90 top
MICRO_SD  DM3AT-SF-PEJM5  [HRS_DM3AT-SF-PEJM5]  90.42,108.52 0 top
NTC  10k  [R0603]  77.09,66.99 0 top
POWER  SK-12D01-VG4  [SK-12D01-VG4]  45.72,45.4 0 top
PRES1  S3B-ZR  [S3B-ZR]  36.83,23.42 180 top
PRES2  S3B-ZR  [S3B-ZR]  48.26,23.42 180 top
PROG  THAF01-NC-R  [THAF01-NC-R]  98.68,94.94 330 bottom
Q1  HN1C01FU  [SOT-363]  78.41,104.57 270 top
Q2  IRLML6402  [SOT-23]  91.69,62.41 0 top
Q3  IRLML6402  [SOT-23]  33.02,77.4 0 top
R1  1k  [R0402]  99.95,94.42 270 top
R2  1k  [R0402]  82.55,94.29 90 top
R3  10k  [R0402]  78.39,102.8 180 top
R4  10k  [R0402]  81.42,103.26 180 top
R5  10k  [R0402]  81.41,104.39 0 top
R6  10k  [R0402]  100.46,113.59 90 top
R7  10k  [R0402]  100.46,111.44 90 top
R8  27.4  [R0402]  92.08,49.08 270 top
R9  27.4  [R0402]  93.34,49.08 270 top
R10  100  [R0402]  100.33,51.11 0 top
R11  220  [R0402]  78.74,50.98 180 top
R12  1k  [R0402]  98.55,58.48 180 top
R13  1k  [R0402]  78.11,52.25 0 top
R14  1k  [R0402]  99.82,105.72 0 top
R15  100k  [R0402]  93.6,67.49 0 top
R16  0.033  [R0603]  101.98,65.21 0 top
R17  100  [R0402]  102.23,59.37 180 top
R18  10k  [R0402]  100.58,58.86 90 top
R19  100k  [R0402]  102.23,58.22 0 top
R20  100k  [R0402]  98.68,59.62 0 top
R21  10k  [R0402]  86.11,68.38 180 top
R22  100k  [R0402]  93.22,66.22 180 top
R23  100  [R0402]  86.36,67.24 180 top
R24  10k  [R0402]  81.91,66.99 0 top
R25  0.033  [R0603]  84.96,65.46 0 top
R26  [R0603]  27.94,92.39 0 top
R27  10  [R0603]  44.45,119.94 0 top
R28  [R0603]  36.83,92.39 0 top
R29  [R0603]  22.86,116.13 0 top
R30  [R0603]  26.67,116.13 0 top
R31  [R0603]  34.92,104.7 0 top
R32  10k  [R0603]  19.05,122.48 180 top
R33  100k  [R0603]  19.05,119.94 180 top
R34  [R0603]  32.38,92.39 0 top
R35  [R0603]  31.12,102.16 0 top
R36  27Ω  [R0402]  92.08,5.39 270 top
R37  27Ω  [R0402]  93.34,5.39 270 top
R38  1k  [R0402]  100.33,7.42 0 top
R39  1k  [R0402]  78.74,7.3 180 top
R40  1k  [R0402]  98.55,14.79 180 top
R41  1k  [R0402]  78.11,8.57 180 top
R42  10k  [R0402]  95.89,34.6 135 top
R43  10k  [R0402]  96.39,22.79 225 top
R44  1k  [R0603]  27.94,47.55 180 top
R45  0.033  [R0603]  30.38,69.61 180 top
R46  100  [R0603]  39.37,71.25 0 top
R47  10k  [R0603]  34.92,67.24 0 top
R48  0.033  [R0603]  30.58,57.45 180 top
R49  100  [R0603]  39.37,57.08 0 top
R50  10k  [R0603]  34.92,55.17 0 top
R51  10k  [R0603]  39.24,61.27 0 top
R52  1M  [R0603]  36.83,76.33 0 top
R53  100k  [R0603]  36.83,74.22 0 top
R54  1M  [R0603]  50.8,74.22 0 top
R55  100k  [R0603]  50.8,76.33 0 top
R56  470  [R0603]  37.46,47.55 0 top
R57  10k  [R0603]  33.02,74.22 0 top
R58  1k  [R0603]  25.4,74.22 0 top
R59  10k  [R0603]  25.4,77.4 0 top
R60  1k  [R0603]  29.21,74.22 180 top
R61  10k  [R0603]  25.4,71.05 0 top
R62  1k  [R0603]  33.02,47.55 0 top
R63  1M  [R0603]  20.95,68.51 180 top
R64  100k  [R0603]  25.4,68.51 180 top
R65  1k  [R0603]  27.94,3.49 0 top
R66  1M  [R0603]  31.75,29.14 180 top
R67  100  [R0603]  40.64,34.22 90 top
R68  100  [R0603]  35.56,34.22 90 top
R69  22k  [R0603]  40,14.53 0 top
R70  10k  [R0603]  40,12.63 180 top
R71  100  [R0603]  49.53,34.22 90 top
R72  100  [R0603]  44.45,34.22 90 top
R73  22k  [R0603]  52.7,14.53 0 top
R74  10k  [R0603]  52.7,12.63 180 top
R75  10k  [R0603]  39.5,20.25 90 top
R76  15k  [R0603]  37.34,20.25 270 top
R77  1k  [R0603]  38.1,3.36 0 top
R78  1k  [R0603]  43.18,3.36 0 top
R79  1k  [R0603]  48.26,3.36 0 top
R80  1k  [R0603]  33.02,3.36 0 top
R81  10k  [R0603]  50.04,20.25 90 top
R82  15k  [R0603]  47.88,20.25 270 top
R83  10k  [R0603]  41.53,20.25 270 top
R84  100k  [R0603]  43.56,20.25 270 top
RESET  THAF01-NC-R  [THAF01-NC-R]  82.17,94.93 30 bottom
RP  RP2040  [QFN40P700X700X90-57N]  92.71,11.11 180 top
RP1  RP2040  [QFN40P700X700X90-57N]  92.71,54.79 180 top
S1  SSAJ120100  [SSAJ120100]  89.53,80.19 180 bottom
STM32  STM32F072-LQFP48  [LQFP48]  22.86,15.17 90 top
STM32F001  STM32F072-LQFP48  [LQFP48]  22.86,58.98 90 top
SUPPLY  [S2B-PH-K-S]  97.16,69.4 0 top
SUPPLY1  [S3B-PH-K-S]  23.49,82.48 0 top
SW  S2B-ZR  [S2B-ZR]  81.91,63.68 270 top
SW1  TVAF06-A020B-R  [TVAF06-A020B-R]  80.64,54.79 0 top
SW2  TVAF06-A020B-R  [TVAF06-A020B-R]  80.64,10.85 0 top
SWITCH  [S2B-PH-K-S]  15.88,82.48 0 top
T1  [SOT23-EBC]  29.21,77.4 180 top
T2  [SOT23-BEC]  40,8.19 270 top
T3  [SOT23-BEC]  52.7,8.19 270 top
TEMP  [S2B-PH-K-S]  19.05,126.3 0 top
TEMP1  S2B-ZR  [S2B-ZR]  42.55,23.42 180 top
TOP  P5_2.54  [P5_2.54]  74.03,63.68 0 top
TOP1  P5_2.54  [P5_2.54]  74.03,20 0 top
TWE  P2_2_2.54  [P2_2.54]  76.83,21.27 180 top
U1  NJM11100  [SOT95P240X110-6N]  99.69,97.08 270 top
U2  NJM11100  [SOT95P240X110-6N]  102.93,108.01 270 top
U3  NJM12888F  [SOT95P240X110-5N]  85.98,49.08 0 top
U4  NJM12888F  [SOT95P240X110-5N]  81.41,98.61 90 top
U5  MCP73831  [SOT23-5L]  84.96,62.67 180 top
U6  SPU0414HR5H-SB  [SPU0414HR5H-SB]  78.36,112.07 0 top
U7  LT6106CS5#PBF  [SOT95P280X100-5N_LT6106CS5#PBF]  101.98,62.03 90 top
U8  TPS63000  [10-VFDFN]  96.77,62.67 270 top
U9  TCK106AF,LF  [IC_TCK106AF,LF]  89.53,68 0 top
U10  NEO-M9N-00B  [XCVR_NEO-M9N-00B]  44.45,108.52 180 top
U11  STM32L433CCT6  [QFP50P900X900X160-48N]  22.86,103.44 90 top
U12  NJM12888F  [SOT95P240X110-5N]  85.98,5.39 0 top
U13  E220-900T22S  [E220-900T22S]  89.53,22.83 180 bottom
U14  LT1616ES6TRMPBF  [SOT-6_S]  34.92,64.06 0 top
U15  LT6106CS5#PBF  [SOT95P280X100-5N_LT6106CS5#PBF]  34.92,70.41 180 top
U16  LT1616ES6TRMPBF  [SOT-6_S]  34.92,52 0 top
U17  LT6106CS5#PBF  [SOT95P280X100-5N_LT6106CS5#PBF]  34.92,58.35 180 top
U18  TCK106AF,LF  [IC_TCK106AF,LF]  20.95,76.76 0 top
U19  TCK106AF,LF  [IC_TCK106AF,LF]  20.95,71.69 0 top
U20  TD62083AFNG  [SSOP18-P-225-0.65]  26.03,30.41 90 top
U21  LT1930  [SOT95P240X110-5N]  27.94,24.69 0 top
U22  HX711  [SOP127P600X180-16N]  34.29,12.63 180 top
U23  HX711  [SOP127P600X180-16N]  46.99,12.63 180 top
U$1  EDGE30  [EDGE30]  10,108.52 270 top
U$2  P2_2_2.54  [P2_2.54]  78.11,58.6 90 top
U$3  S1S0-3030XX9506  [S1S0-3030XX9506]  67.82,84.33 90 top
U$4  S1S0-3030XX9506  [S1S0-3030XX9506]  63.82,84.33 90 top
U$5  P2_2_2.54  [P2_2.54]  78.11,14.92 90 top
U$6  LITE  [LITE]  79.65,28.25 315 top
U$7  EDGE30  [EDGE30]  10,64.06 270 top
U$8  SMD1812P125TS  [SMD1812P]  43.81,75.5 180 top
U$9  EDGE30  [EDGE30]  10,20.25 270 top
UART  S4B-ZR  [S4B-ZR]  37.46,127.56 180 top
VR  100k  [PVZ3A]  31.75,24.69 180 top
VR1  100k  [PVZ3A]  99.79,103.17 0 top
VR2  100k  [PVZ3A]  99.78,108.23 180 top
VR3  100k  [PVZ3A]  78.36,107.88 0 top
VR4  22k  [PVZ3A]  101.98,67.88 0 top
VR5  22k  [PVZ3A]  30.48,66.74 270 top
VR6  22k  [PVZ3A]  30.48,54.77 270 top
VRP  10k  [PVZ3A]  88.27,62.67 180 top
X1  FA-238  [FA-238]  98.51,54.79 270 top
X2  FA-238  [FA-238]  98.51,11.1 270 top
XTAL  32.768kHz  [FC-255]  22.86,4.38 180 top

## Library data of the parts
AB BAT CD HEATER HEATER1 SUPPLY SUPPLY1 SWITCH TEMP = jst-ph
AN = connector; DIGIKEY: H122041-ND; MANUFACTURER: Hirose; MPN: U.FL-R-SMT-1(01)
BAT1 BAT2 = con-jst-xh
BOTTOM BOTTOM1 C9 C10 TOP TOP1 TWE U$2 U$5 = pins
C1-C8 C11-C102 CL1-CL4 = rcl; SPICEPREFIX: C
CAM = camera
CELL = capacitors
CRYSTAL CRYSTAL1 X1 X2 XTAL = crystal'
D1 D3 D5-D13 = diodes
D2 D4 = RB521S-30TE61; DESCRIPTION: ROHM - RB521S-30TE61 - DIODE, SCHOTTKY, SMD; HEIGHT: 0.7mm; MANUFACTURER_NAME: ROHM Semiconductor; MANUFACTURER_PART_NUMBER: RB521S-30TE61; MOUSER_PART_NUMBER: 755-RB521S-30TE61; MOUSER_PRICE-STOCK: https://www.mouser.com/Search/Refine.aspx?Keyword=755-RB521S-30TE61; RS_PART_NUMBER: 0178677; RS_PRICE-STOCK: http://uk.rs-online.com/web/p/products/0178677
D14 = diode
ESP32 = ESP32-S3-WROOM-1-N16R2; AVAILABILITY: In Stock; DESCRIPTION: Bluetooth, WiFi 802.11b/g/n, Bluetooth v5.0 Transceiver Module 2.4GHz PCB Trace Surface Mount; MF: Espressif Systems; MP: ESP32-S3-WROOM-1-N16R2; PACKAGE: None; PRICE: None; PURCHASE-URL: https://pricing.snapeda.com/search/part/ESP32-S3-WROOM-1-N16R2/?ref=eda
FC-135 = tere
FLASH FLASH1 = W25Q32JVZPIQ; AVAILABILITY: In Stock; DESCRIPTION: FLASH - NOR Memory IC 32Mb (4M x 8) SPI - Quad I/O 133 MHz 8-WSON (6x5); MF: Winbond; MP: W25Q32JVZPIQ; PACKAGE: WSON-8 Winbond; PRICE: None; PURCHASE-URL: https://pricing.snapeda.com/search/part/W25Q32JVZPIQ/?ref=eda
I2C LOAD_X LOAD_Y UART = con-jst; MF: FARNELL; MPN: S4B-ZR(LF)(SN); OC_FARNELL: 9491830; OC_NEWARK: 38K8076
IC1 IC2 = 40xx
IC3 = BNO055; PART_NUMBER: BNO055
IC4 = bosch-bme280
J1-J4 = connector
L1 = rcl; SPICEPREFIX: L
L2 = inductor-neosid; OC_FARNELL: unknown; OC_NEWARK: unknown
L3-L5 = inductors
LED0 LED1-LED16 = led
MCP1 MCP2 MCP2562 = mcp2562-E_SN; AVAILABILITY: Unavailable; DESCRIPTION: Microchip MCP2562-E/SN, CAN Transceiver 1MBps 1-channel IEC 61000-4-2, 8-Pin SOIC; MF: Microchip; MP: MCP2562-E/SN; PACKAGE: SO-8 Microchip; PRICE: None
MICRO_SD = dm3at-sf-pejm5; DESCRIPTION: DM3 RA SMT microSD memory card push/push; DIGI-KEY_PART_NUMBER: HR1964CT-ND; DIGI-KEY_PURCHASE_URL: https://www.digikey.jp/product-detail/en/hirose-electric-co-ltd/DM3AT-SF-PEJM5/HR1964CT-ND/2533566?utm_source=snapeda&utm_medium=aggregator&utm_campaign=symbol; MF: Hirose; MP: DM3AT-SF-PEJM5; PACKAGE: None
NTC R1-R84 = rcl; SPICEPREFIX: R
POWER PROG RESET SW1 SW2 = switches
PRES1 PRES2 SW TEMP1 = con-jst-zh
Q1 U20 = transistors
Q2 Q3 = mosfet
RP RP1 = RP2040; AVAILABILITY: In Stock; DESCRIPTION: RP2040 chip for Raspberry Pi Pico - ARM® Cortex®-M0+ MCU 32-Bit; MF: Raspberry Pi; MP: RP2040; PACKAGE: None; PRICE: None; PURCHASE-URL: https://pricing.snapeda.com/search/part/RP2040/?ref=eda
S1 = SSAJ120100; DESCRIPTION: Slide Switches 1-pole 2-positions Surface Mount Slide Switch SPDT Maintained 10 mA Slide; HEIGHT: mm; MANUFACTURER_NAME: ALPS; MANUFACTURER_PART_NUMBER: SSAJ120100; MOUSER_PART_NUMBER: 688-SSAJ120100; MOUSER_PRICE-STOCK: https://www.mouser.com/Search/Refine.aspx?Keyword=688-SSAJ120100; RS_PART_NUMBER: 1238892; RS_PRICE-STOCK: http://uk.rs-online.com/web/p/products/1238892
STM32 STM32F001 = stm32f0
T1-T3 = transistor
U1-U4 U12 = regulators
U5 = mcp73831
U6 = microphones
U7 U15 U17 = LT6106CS5_PBF; AVAILABILITY: Not in stock; DESCRIPTION: LT6106 - Low Cost, 36V High Side Current Sense Amplifier; MF: Linear Technology; MP: LT6106CS5#PBF; PACKAGE: TSOT-23 Linear Technology; PRICE: None
U8 = TPS63000; AVAILABILITY: Not in stock; DESCRIPTION: TPS63000 DC to DC Converter and Switching Regulator Chip 3.2VDC to 3.4VDC Output Evaluation Board; MF: Texas Instruments; MP: TPS63000; PACKAGE: VFDFN-10 Texas Instruments; PRICE: None
U9 U18 U19 = TCK106AF_LF; AVAILABILITY: In Stock; DESCRIPTION: Power Switch/Driver 1:1 P-Channel 1A 5-SMV, SOT-25, SC-74A; MF: Toshiba Semiconductor; MP: TCK106AF,LF; PACKAGE: SOT-753 Toshiba Semiconductor; PRICE: None; PURCHASE-URL: https://pricing.snapeda.com/search/part/TCK106AF,LF/?ref=eda
U10 = NEO-M9N-00B; AVAILABILITY: In Stock; DESCRIPTION: series RF Receiver BeiDou, Galileo, GLONASS, GNSS, GPS - -167dBm - - Module; MF: u-blox; MP: NEO-M9N-00B; PACKAGE: SMD-24 u-blox; PRICE: None; PURCHASE-URL: https://pricing.snapeda.com/search/part/NEO-M9N-00B/?ref=eda
U11 = STM32L433CCT6; AVAILABILITY: In Stock; DESCRIPTION: ARM® Cortex®-M4 STM32L4 Microcontroller IC 32-Bit Single-Core 80MHz 256KB (256K x 8) FLASH 48-LQFP (7x7); MF: STMicroelectronics; MP: STM32L433CCT6; PACKAGE: LQFP-48 STMicroelectronics; PRICE: None; PURCHASE-URL: https://pricing.snapeda.com/search/part/STM32L433CCT6/?ref=eda
U13 = lora
U14 U16 = LT1616ES6TRMPBF; AVAILABILITY: In Stock; DESCRIPTION: 600mA, 1.4MHz Step-Down Switching Regulator in SOT-23; MF: Analog Devices; MP: LT1616ES6#TRMPBF; PACKAGE: SOT-6 Analog Devices; PRICE: None; PURCHASE-URL: https://pricing.snapeda.com/search/part/LT1616ES6#TRMPBF/?ref=eda
U21 = dcdc
U22 U23 = HX711; AVAILABILITY: Not in stock; DESCRIPTION: Precision 24-bit analog-to-digital converter (ADC) designed for weigh scales and industrial control applications to interface directly with a bridge sensor.; MF: AVIA SEMICONDUCTOR; MP: HX711; PACKAGE: None; PRICE: None
U$1 U$7 U$9 = bus
U$3 U$4 = leds
U$6 = TWELite
U$8 = ptc
VR VR1-VR6 VRP = potentiometers

## Nets
1.5V: C11.1 C12.1 CAM.10 U1.4 VR1.1
1PPS: LED5.A R28.1 R28.2 U10.3 U11.28
1V1: C65.1 C66.1 C67.1 RP.23 RP.45 RP.50
1V2: C31.1 C32.1 C33.1 RP1.23 RP1.45 RP1.50
2.8V: C15.1 C16.1 C18.1 CAM.4 CAM.11 R6.1 R7.2 U2.4 VR2.1
3V3: C81.1 L4.2 R48.1 R49.2 U17.5 VR6.3
5V: C79.1 L3.2 R45.1 R46.2 U15.5 VR5.3
!SHDN!: C82.1 POWER.B SWITCH.2 U14.4 U16.4
A_OUT: AB.2 U20.P17 U20.P18
ADC0_IN: IC1.2 IC1.3 RP1.38
ADC1_IN: IC1.9 IC1.10 RP1.39
ADC2_IN: IC2.2 IC2.3 IC2.9 RP1.40
ADC_SEL1: IC1.6 IC1.13 IC2.13 RP1.16
ADC_SEL2: IC1.5 IC1.12 IC2.5 RP1.31
ADC_SEL3: IC2.6 RP1.29
ANT: AN.SIG L2.2 U10.11
B_OUT: AB.4 U20.P15 U20.P16
BAT1: BAT1.1 D10.A Q3.P2 R52.2 R57.2
BAT1_V: R52.1 R53.2 STM32F001.18
BAT2: BAT2.1 D11.A R54.2
BAT2_V: R54.1 R55.2 STM32F001.17
BAT_V: IC1.4 R19.1 R20.2
BNO_!RESET!: IC3.11 R31.1 U11.20
C_OUT: CD.2 U20.P13 U20.P14
CAM_POWER: ESP32.37 U1.1 U2.1
CAM_RESET: CAM.6 ESP32.6
CAN_RX: MCP2562.4 U11.45
CAN_RX1: MCP1.4 STM32F001.45
CAN_RX2: MCP2.4 STM32.45
CAN_TX: MCP2562.1 U11.46
CAN_TX1: MCP1.1 STM32F001.46
CAN_TX2: MCP2.1 STM32.46
CANH1: MCP2562.7 U$1.7
CANH2: MCP1.7 U$7.7
CANH3: MCP2.7 U$9.7
CANL1: MCP2562.6 U$1.6
CANL2: MCP1.6 U$7.6
CANL3: MCP2.6 U$9.6
CHARGE: RP1.18 U5.1
D0: CAM.19 ESP32.32
D1: CAM.21 ESP32.34
D2: CAM.22 ESP32.35
D3: CAM.20 ESP32.33
D4: CAM.18 ESP32.31
D5: CAM.16 ESP32.16
D6: CAM.14 ESP32.26
D7: CAM.12 ESP32.24
D_OUT: CD.4 U20.P11 U20.P12
EN: C6.1 ESP32.3 Q1.6 R5.1 RESET.3 RESET.4
EN1: C37.1 S1.2 SW.2 U8.6 U8.7 U8.8
GND: C1.2 C2.2 C3.2 C4.2 C6.2 C7.2 C8.2 C9.1 C9.5 C10.1 C10.5 C11.2 C13.2 C14.2 C15.2 C17.2 C18.2 C19.2 C20.2 C21.2 C22.2 CAM.2 CAM.15 CAM.PAD1 CAM.PAD2 ESP32.1 ESP32.40 ESP32.41_1 ESP32.41_2 ESP32.41_3 ESP32.41_4 ESP32.41_5 ESP32.41_6 ESP32.41_7 ESP32.41_8 ESP32.41_9 J1.CGND1 J1.CGND2 J1.CGND3 J1.CGND4 J1.CGND5 J1.CGND6 J1.GND LED0.C LED1.C MICRO_SD.6 MICRO_SD.P1 MICRO_SD.P2 MICRO_SD.P3 MICRO_SD.P4 MICRO_SD.SWB Q1.1 Q1.4 R14.2 RESET.1 RESET.2 U1.2 U2.2 U4.2 U6.2 VR1.3 VR2.3
GND1: BAT.2 BOTTOM.1 BOTTOM.5 C5.2 C23.2 C24.2 C25.2 C26.2 C27.2 C28.2 C29.2 C30.2 C31.2 C32.2 C33.2 C34.2 C35.2 C36.2 C37.2 C38.2 FLASH.4 FLASH.9 IC1.7 IC2.7 J2.CGND1 J2.CGND2 J2.CGND3 J2.CGND4 J2.CGND5 J2.CGND6 J2.GND LED3.C LED4.C NTC.1 R18.1 R20.1 R22.1 R25.1 RP1.19 RP1.57 SUPPLY.2 SW1.P$1 TOP.1 TOP.5 U3.2 U5.2 U7.2 U8.3 U8.9 U8.P$1 U8.P$2 U8.P$3 U8.P$4 U8.P$5 U9.2 VR4.3 VRP.1 X1.2 X1.4
GND2: AN.GND1 AN.GND2 C39.2 C40.2 C41.2 C42.2 C43.2 C44.2 C45.1 C46.1 C47.2 C48.2 C49.2 C50.2 C51.2 C52.1 C53.1 C54.2 C55.2 CELL.- I2C.2 IC3.2 IC3.5 IC3.6 IC3.17 IC3.18 IC3.25 IC4.1 IC4.5 IC4.7 J3.CGND1 J3.CGND2 J3.CGND3 J3.CGND4 J3.CGND5 J3.CGND6 J3.GND LED5.C MCP2562.2 MCP2562.8 TEMP.2 U10.10 U10.12 U10.13 U10.24 U11.8 U11.23 U11.35 U11.47 U$1.5 U$1.8 UART.2
GND3: BOTTOM1.1 BOTTOM1.5 C56.2 C57.2 C58.2 C59.2 C60.2 C61.2 C62.2 C63.2 C64.2 C65.2 C66.2 C67.2 C68.2 C69.2 C70.2 C71.2 FLASH1.4 FLASH1.9 J4.CGND1 J4.CGND2 J4.CGND3 J4.CGND4 J4.CGND5 J4.CGND6 J4.GND LED7.C LED8.C R43.1 RP.19 RP.57 SW2.P$1 TOP1.1 TOP1.5 U12.2 U13.P1 U13.P2 U13.P3 U13.P4 U13.P11 U13.P13 U13.P19 U13.P20 U13.P22 U$6.20 U$6.28 X2.2 X2.4
GND4: BAT1.2 BAT2.2 C72.2 C73.2 C74.2 C75.2 C76.2 C77.2 C78.2 C79.2 C80.2 C81.2 C82.2 CL3.1 CL4.1 D6.A D8.A HEATER1.2 LED10.C MCP1.2 MCP1.8 R47.1 R50.1 R53.1 R55.1 R59.1 R64.1 STM32F001.8 STM32F001.23 STM32F001.35 STM32F001.47 SUPPLY1.2 T1.E U14.2 U15.2 U16.2 U17.2 U18.2 U19.2 U$7.5 U$7.8 VR5.1 VR6.1
GND5: C83.2 C84.2 C85.2 C86.2 C88.2 C89.2 C90.2 C91.2 C93.2 C94.2 C95.2 C96.2 C97.2 C98.2 C99.2 C100.2 C101.2 C102.2 CL1.1 CL2.1 LOAD_X.2 LOAD_Y.2 MCP2.2 MCP2.8 PRES1.2 PRES2.2 R70.1 R74.1 R76.1 R82.1 STM32.8 STM32.23 STM32.35 STM32.47 TEMP1.2 U20.P9 U21.2 U22.5 U22.9 U22.10 U22.14 U23.5 U23.9 U23.10 U23.14 U$9.5 U$9.8 VR.1
GPS_!RESET!: U10.8 U11.29
GPS_RTX: U10.20 U11.31
GPS_TRX: U10.21 U11.30
HEATER: RP1.17 U9.3
HEATER1: R58.1 STM32F001.30
HEATER+: HEATER1.1 Q3.P3
HEATER_I: HEATER.2 IC1.11 R25.2
HEATER_OUT: HEATER.1 U9.1
HSYNC: CAM.9 ESP32.8
I2C1_SCL: I2C.4 U11.42
I2C1_SDA: I2C.3 U11.43
I2C2_SCL: IC3.19 IC4.4 R30.1 U10.19 U11.21
I2C2_SDA: IC3.20 IC4.3 R29.1 U10.18 U11.22
I2C_SCL: CAM.5 ESP32.4 R6.2
I2C_SDA: CAM.3 ESP32.5 R7.1
IO0: C22.1 ESP32.27 Q1.3
LED0: ESP32.21 R1.2
LED1: ESP32.22 R2.2
LED2: R10.2 RP1.2
LED3: R11.2 RP1.37
LED4: R38.2 RP.2
LED5: R39.2 RP.37
LORA_AUX: RP.14 U13.P9
LORA_M0: RP.9 U13.P5
LORA_M1: RP.11 U13.P6
LORA_RTX: RP.16 U13.P8
LORA_TRX: RP.15 U13.P7
MIC: ESP32.39 U6.4
N$1: C8.1 U1.3
N$2: C12.2 U1.5 VR1.2
N$3: C14.1 U2.3
N$4: C16.2 U2.5 VR2.2
N$5: PROG.3 PROG.4 R3.1 R4.1
N$6: LED3.A R10.1
N$7: LED0.A R1.1
N$8: LED1.A R2.1
N$9: Q1.2 R3.2
N$10: CAM.8 R14.1
N$11: Q1.5 R4.2
N$12: LED4.A R11.1
N$13: U6.3 VR3.2
N$14: C20.1 VR3.3
N$15: C35.1 R12.1 X1.1
N$16: U5.5 VRP.2
N$17: R17.1 U7.3
N$18: L1.1 U8.4
N$19: L1.2 U8.2
N$20: R23.2 S1.C SW.1
N$21: U11.7 U$1.15
N$22: R27.2 U10.9
N$23: C47.1 L2.1 R27.1
N$24: CELL.+ D2.1 D4.1 U10.22
N$25: C51.1 IC3.9
N$26: C53.2 FC-135.P$2 IC3.27
N$27: C52.2 FC-135.P$1 IC3.26
N$28: LED6.C U11.11
N$29: LED6.A R34.2
N$30: IC3.4 R35.1
N$31: LED2.C U11.10
N$32: U$3.C
N$33: U$4.C
N$34: U$4.A
N$35: U$3.A
N$36: D5.A J4.VBUS
N$37: LED7.A R38.1
N$38: LED8.A R39.1
N$39: C69.1 R40.1 X2.1
N$40: CL4.2 CRYSTAL1.1 STM32F001.4
N$41: R46.1 U15.3
N$42: R49.1 U17.3
N$43: POWER.C R51.1 SWITCH.1
N$44: SUPPLY1.1 U18.1 U19.1
N$45: LED10.A R56.2
N$46: Q3.P1 R57.1 R60.1
N$47: R56.1 R58.2 R59.2 T1.B
N$48: R60.2 T1.C
N$49: LED11.C STM32F001.11
N$50: LED11.A R62.2
N$51: LED12.C STM32.10
N$52: LED12.A R65.2
N$53: D14.A L5.2 U21.1
N$54: R66.1 VR.3
N$55: C87.2 R67.1 U22.7
N$56: C87.1 R68.1 U22.8
N$57: T2.B U22.2
N$58: C90.1 U22.6
N$59: R69.1 R70.2 U22.4
N$60: C92.2 R71.1 U23.7
N$61: C92.1 R72.1 U23.8
N$62: T3.B U23.2
N$63: C95.1 U23.6
N$64: R73.1 R74.2 U23.4
N$65: PRES1.3 R75.2
N$66: LED13.C STM32.12
N$67: LED13.A R77.2
N$68: LED14.C STM32.20
N$69: LED14.A R78.2
N$70: C46.2 CRYSTAL.1 U11.4
N$71: C45.2 CRYSTAL.2 U11.3
N$72: CL3.2 CRYSTAL1.2 STM32F001.3
N$73: LED9.C STM32F001.10
N$74: LED2.A R26.2
N$75: LED15.C STM32.14
N$76: LED9.A R44.2
N$77: LED15.A R79.2
N$78: CL2.2 STM32.4 XTAL.1
N$79: CL1.2 STM32.3 XTAL.2
N$80: LED16.C STM32.11
N$81: LED16.A R80.2
N$82: PRES2.3 R81.2
NRST: STM32.7 U$9.15
NRST1: STM32F001.7 U$7.15
OB_TEMP: IC2.8 NTC.2 R24.1
PCLK: C17.1 CAM.17 ESP32.15
POWER_FB: STM32.19 U21.3 VR.2
POWER_ON: STM32.25 U21.4
PRESSURE_1: R75.1 R76.2 STM32.18
PRESSURE_2: R81.1 R82.2 STM32.15
QSPI_SCLK: FLASH.6 RP1.52
QSPI_SCLK1: FLASH1.6 RP.52
QSPI_SD0: FLASH.5 RP1.53
QSPI_SD1: FLASH.2 RP1.55
QSPI_SD2: FLASH.3 RP1.54
QSPI_SD3: FLASH.7 RP1.51
QSPI_SD4: FLASH1.5 RP.53
QSPI_SD5: FLASH1.2 RP.55
QSPI_SD6: FLASH1.3 RP.54
QSPI_SD7: FLASH1.7 RP.51
QSPI_SS: FLASH.1 R13.2 RP1.56
QSPI_SS1: FLASH1.1 R41.2 RP.56
RX0: C9.4 ESP32.36
RX1: C10.4 ESP32.10
RX2: RP1.28 TOP.4
RX3: BOTTOM.4 RP1.7
RX4: RP.28 TOP1.4
RX5: BOTTOM1.4 RP.7
SD: ESP32.23 MICRO_SD.SWA
SDIO_D1: ESP32.12 MICRO_SD.8
SDIO_D2: ESP32.11 MICRO_SD.1
SPI0_CS: ESP32.17 MICRO_SD.2
SPI0_MISO: ESP32.20 MICRO_SD.7
SPI0_MOSI: ESP32.18 MICRO_SD.3
SPI0_SCK: ESP32.19 MICRO_SD.5
SUPPLY_3V3: STM32F001.32 U19.3
SUPPLY_5V: STM32F001.33 U18.3
SUPPLY_CON: STM32F001.31 SUPPLY1.3
SUPPLY_V: IC1.1 R15.1 R22.2
SW: R13.1 RP1.35 SW1.P$2
SW1: R41.1 RP.35 SW2.P$2
SWCLK: RP1.24 U$2.P$1
SWCLK1: U11.37 U$1.11
SWCLK2: RP.24 U$5.P$1
SWCLK3: STM32F001.37 U$7.11
SWCLK4: STM32.37 U$9.11
SWD: RP1.25 U$2.P$2
SWD1: RP.25 U$5.P$2
SWDIO1: U11.34 U$1.10
SWDIO2: STM32F001.34 U$7.10
SWDIO3: STM32.34 U$9.10
TEMP: HEATER.3 IC2.4 R21.1
TEMP1: R32.1 R33.1 TEMP.1 U11.19
TEMP2: HEATER1.3 R61.1 STM32F001.12
TEMP3: R83.1 R84.1 STM32.13 TEMP1.1
TEMP_HIGH: R32.2 U11.33
TEMP_HIGH1: R83.2 STM32.32
TEMP_LOW: R33.2 U11.32
TEMP_LOW1: R84.2 STM32.31
TWE_BPS: RP.31 U$6.19
TWE_PGM: RP.12 U$6.2
TWE_RESET: R43.2 RP.30 U$6.21
TWE_RTS: RP.13 U$6.7
TWE_RTX: RP.17 TWE.P$2 U$6.8
TWE_SLEEP: R42.1 RP.29 U$6.27
TWE_TRX: RP.18 TWE.P$1 U$6.9
TX0: C9.2 ESP32.38
TX1: C10.2 ESP32.9
TX2: RP1.27 TOP.2
TX3: BOTTOM.2 RP1.6
TX4: RP.27 TOP1.2
TX5: BOTTOM1.2 RP.6
UART_RTX: U11.13 UART.4
UART_TRX: U11.12 UART.3
USB_D+: J3.D+ U10.6
USB_D-: J3.D- U10.5
USB_DM: ESP32.13 J1.D-
USB_DM1: J2.D- R8.2
USB_DM2: J4.D- R36.2
USB_DM_1: R8.1 RP1.46
USB_DM_2: R36.1 RP.46
USB_DP: ESP32.14 J1.D+
USB_DP1: J2.D+ R9.2
USB_DP2: J4.D+ R37.2
USB_DP_1: R9.1 RP1.47
USB_DP_2: R37.1 RP.47
USB_VCC: D1.A J1.VBUS
V+: C1.1 C7.1 C9.3 C10.3 C13.1 D1.C U1.6 U2.6 U4.1 U4.3
V+1: BOTTOM.3 C24.1 R16.2 TOP.3 U3.1 U3.3 U7.4
V+2: BOTTOM1.3 C58.1 D5.C TOP1.3 U12.1 U12.3
V+3: STM32.1 U$9.4
V+_I: IC1.8 R18.2 U7.1
V+_V: IC2.1 U8.10 VR4.2
V_VALVE: AB.1 AB.3 C86.1 CD.1 CD.3 D14.C R66.2 U20.P10
VALVE_A: STM32.29 U20.P1 U20.P2
VALVE_B: STM32.28 U20.P3 U20.P4
VALVE_C: STM32.27 U20.P5 U20.P6
VALVE_D: STM32.26 U20.P7 U20.P8
VBAT: BAT.1 Q2.P3 R19.2 U5.3
VBAT1: D4.2 U11.1 U$1.4
VBAT2: STM32F001.1 U$7.4
VBAT_: C36.1 D3.C Q2.P2 R23.1 U8.5 U9.5
VCC: C41.1 MCP2562.3 U$1.2
VCC1: C74.1 D12.C MCP1.3 U18.5 U$7.2
VCC2: C84.1 C91.1 C96.1 C97.1 C102.1 MCP2.3 PRES1.1 PRES2.1 T2.E T3.E U22.1 U23.1 U$9.2
VCC': D12.A R45.2 U15.4
VCC_I: R47.2 STM32F001.16 U15.1
VCC_IN: C78.1 D7.C U14.5
VCC_SW: D6.C L3.1 U14.6
VCC_V: STM32F001.15 U14.3 VR5.2
VDD: C2.1 C3.1 C4.1 C19.1 C21.1 ESP32.2 MICRO_SD.4 PROG.1 PROG.2 R5.2 U4.5 U6.1
VDD1: C5.1 C23.1 C25.1 C26.1 C27.1 C28.1 C29.1 C30.1 FLASH.8 IC1.14 IC2.14 R21.2 R24.2 RP1.1 RP1.10 RP1.22 RP1.26 RP1.33 RP1.42 RP1.43 RP1.44 RP1.48 RP1.49 U3.5
VDD2: C39.1 C40.1 C42.1 C43.1 C44.1 C48.1 C49.1 C50.1 C54.1 C55.1 D2.2 I2C.1 IC3.3 IC3.28 IC4.2 IC4.6 IC4.8 MCP2562.5 R26.1 R29.2 R30.2 R31.2 R34.1 R35.2 U10.7 U10.23 U11.9 U11.24 U11.36 U11.48 U$1.3 UART.1
VDD3: C56.1 C57.1 C59.1 C60.1 C61.1 C62.1 C63.1 C64.1 C70.1 C71.1 FLASH1.8 R42.2 RP.1 RP.10 RP.22 RP.26 RP.33 RP.42 RP.43 RP.44 RP.48 RP.49 U12.5 U13.P10 U$6.5
VDD4: C72.1 C73.1 C75.1 C76.1 C77.1 D13.C MCP1.5 R44.1 R61.2 R62.1 STM32F001.9 STM32F001.24 STM32F001.36 STM32F001.48 U19.5 U$7.3
VDD5: C83.1 C89.1 C94.1 C98.1 C99.1 C100.1 C101.1 MCP2.5 R65.1 R77.1 R78.1 R79.1 R80.1 STM32.9 STM32.24 STM32.36 STM32.48 U22.15 U22.16 U23.15 U23.16 U$9.3
VDD': D13.A R48.2 U17.4
VDD_I: R50.2 STM32F001.14 U17.1
VDD_IN: C80.1 D9.C U16.5
VDD_SW: D8.C L4.1 U16.6
VDD_V: STM32F001.13 U16.3 VR6.2
VOUT: C38.1 R16.1 R17.2 U7.5 U8.1 VR4.1
VPP: D3.A J2.VBUS Q2.P1 R15.2 SUPPLY.1 U5.4
VPP1: U$1.1
VPP2: D7.A D9.A R51.2 R63.2 U$7.1 U$8.2
VPP3: C85.1 L5.1 U21.5 U$9.1
VPP_IN: D10.C D11.C U$8.1
VPP_V: R63.1 R64.2 STM32F001.19
VSYNC: CAM.7 ESP32.7
X_DATA: STM32.16 U22.12
X_SCK: STM32.17 U22.11
X_SIG+: LOAD_X.4 R68.2
X_SIG-: LOAD_X.3 R67.2
X_VDD: C88.1 LOAD_X.1 R69.2 T2.C U22.3
XCLK: CAM.13 ESP32.25
XIN1: C34.1 RP1.20 X1.3
XIN2: C68.1 RP.20 X2.3
XOUT1: R12.2 RP1.21
XOUT2: R40.2 RP.21
Y_DATA: STM32.21 U23.12
Y_SCK: STM32.22 U23.11
Y_SIG+: LOAD_Y.4 R72.2
Y_SIG-: LOAD_Y.3 R71.2
Y_VDD: C93.1 LOAD_Y.1 R73.2 T3.C U23.3

## Tracks (layer width: path | path; a pad name or v marks a point on that pad's centre or on a via)
1.5V  (via drill 0.3)
  Top 0.305: CAM.10 91.67,111.96 v91.79,112.07
  Top 0.508: U1.4 98.75,96.62 98.06,97.31 98.06,99.12 98.44,99.5 C12.1 C11.1 99.03,101.63 VR1.1 98.82,101.85 98.82,104.27 96.09,106.99 v95,106.99
  Bottom 0.508: v91.79,112.07 92.84,112.07 94.23,110.67 94.23,107.75 v95,106.99
1PPS  (via drill 0.3)
  Top 0.254: 37.72,92.39 37.72,93.02 38.16,93.47 42.16,93.47 46.64,97.94 46.64,102.44 47.91,103.72 U10.3 | 37.72,92.39 37.72,89.47 LED5.A | U11.28 24.09,107.6 24.09,102.05 24.59,101.55 v24.59,101.25 | v29.4,97.4 29.4,97.21 33.34,93.27 35.09,93.27 R28.1 R28.2 37.72,92.39
  Bottom 0.254: v29.4,97.4 29.14,97.4 25.29,101.25 v24.59,101.25
1V1
  Top 0.2: C65.1 90.91,6.15 RP.45 90.91,8.16 90.93,8.19 | C66.1 95.74,6.04 94.87,6.91 93.22,6.91 92.91,7.22 RP.50 92.91,8.11 92.58,8.44 91.31,8.44 91.25,8.5 90.93,8.19 | 90.93,8.19 89.95,9.17 89.95,12.66 90.17,12.89 91.95,12.89 91.95,12.88 92.8,12.88 92.8,13.89 92.33,13.89 92.11,14.11 RP.23 92.11,17.08 91.95,17.24 91.95,18.09 C67.1
1V2
  Top 0.2: C31.1 90.91,49.83 RP1.45 90.91,51.85 90.93,51.87 | C32.1 95.74,49.73 94.87,50.6 93.22,50.6 92.91,50.91 RP1.50 92.91,51.8 92.58,52.13 91.31,52.13 91.25,52.19 90.93,51.87 | 90.93,51.87 90.33,52.48 90.33,55.14 90.61,55.43 90.73,55.43 90.89,55.59 90.89,56.44 91.15,56.7 91.95,56.7 92.11,56.86 RP1.23 92.11,58.82 90.93,60 C33.1
2.8V
  Top 0.2: 94.93,111.12 94.67,110.86 CAM.4
  Top 0.305: R7.2 100.04,111.52 95.29,111.52 94.92,111.15 94.91,111.15 94.67,110.91 CAM.4 | C18.1 92.82,115.48 91.17,113.84 CAM.11 | U2.4 101.98,106.55 101.84,106.41 101.84,104.83 C16.1
  Top 0.508: U2.4 101.98,107.57 101.27,108.28 101.27,109.04 VR2.1 100.69,109.68 101.19,110.18 101.19,111.61 100.87,111.94 R7.2 R6.1 100.87,113.09 101.19,113.42 101.19,114.85 100.56,115.48 C18.1 | C16.1 C15.1 102.47,103.13
3V3  (via drill 0.3)
  Top 0.254: R48.1 31.43,57.4 33.66,57.4 U17.5
  Top 0.406: 33.66,57.4 31.48,57.4 R48.1 30.36,56.38 v29.96,56.38 | VR6.3 28.57,54.38 28.22,54.38 27.24,55.36 v27.24,55.38
  Top 0.61: v42.75,54.14 42.75,56.89 42.56,57.08 R49.2 C81.1 | C81.1 40.32,59.18 | L4.2 C81.1
  Bottom 0.61: v29.96,56.38 29.86,56.28 28.49,56.28 28.42,56.35 27.77,56.35 27.31,55.89 27.31,55.45 v27.24,55.38 27.31,55.3 27.31,54.51 30.8,51.03 30.8,50.5 31.97,49.33 40.39,49.33 42.75,51.7 v42.75,54.14
5V  (via drill 0.3)
  Top 0.254: 40.32,71.05 40.52,71.25 R46.2 | v29.23,66.64 29.23,66.09 VR5.3
  Top 0.61: v31.52,69.21 31.52,69.9 R45.1 32.55,69.61 v32.64,69.53 33.68,69.53 U15.5 | v37.45,69.43 37.48,69.46 38.2,69.46 C79.1 40.32,70.95 | 40.32,70.95 40.32,71.05 40.51,71.24 L3.2 | R46.2 40.22,71.05 40.32,70.95
  Bottom 0.61: v37.45,69.43 37.35,69.53 v32.64,69.53 | v29.23,66.64 31.52,68.92 v31.52,69.21
!SHDN!  (via drill 0.3)
  Top 0.254: U14.4 35.88,63.11 35.56,63.11 34.29,61.84 34.29,61.52 C82.1 34.02,61.41 34.02,61.39 v33.13,62.28
  Top 0.406: U16.4 36.84,51.05 37.43,50.46 41.63,50.46 44.6,53.43 46.28,53.43 v46.28,53.68 | SWITCH.2 14.88,81.21 18.41,77.67 v18.41,77.4
  Bottom 0.254: 46.79,53.15 46.66,53.28 | v46.28,53.68 46.27,53.68 | 46.56,53.38 46.66,53.38
  Bottom 0.406: POWER.B 47.21,45.9 47.21,52.73 46.79,53.15 | 46.56,53.38 46.27,53.68 37.66,62.28 v33.13,62.28 32.12,62.28 27.2,67.2 27.2,70.66 25.48,72.38 20.22,72.38 17.82,74.78 17.82,76.8 v18.41,77.4 | 46.66,53.38 46.66,53.28
A_OUT
  Top 0.508: U20.P18 23.44,34.48 | 23.44,34.48 21.02,36.89 18.65,36.89 AB.2 | U20.P17 24.09,33.83 23.44,34.48
ADC0_IN  (via drill 0.3)
  Top 0.127: v96.77,58.6 96.9,58.48
  Top 0.2: 96.9,58.48 97.28,58.1 v97.28,57.71 | RP1.38 88.71,53.8 88.1,54.41 v88.01,54.41
  Bottom 0.15: v96.77,58.6 96.72,58.55 95.69,58.55 95.22,58.08 93.96,58.08 93.39,57.51
  Bottom 0.152: v88.01,54.41 88.14,54.54 94.75,54.54 95.4,55.18 95.4,55.67 95.15,55.92 94.31,55.92 93.39,56.85 93.39,57.51
  Bottom 0.2: IC1.2 IC1.3 99.06,59.49 v97.28,57.71
ADC1_IN  (via drill 0.3, 0.3 pad 0.2)
  Top 0.2: v95,63.43 95.3,63.73 95.3,64.59 95,64.89 94.8,64.89 94.68,65.02 94.68,67.37 95.06,67.75 96.52,67.75 97.03,67.24 v97.03,66.6 | v88.01,53.78 88.39,53.39 RP1.39
  Bottom 0.15: 96.52,58.1 96.34,58.27 95.83,58.27 95.32,57.76 94.19,57.76
  Bottom 0.152: v88.01,53.78 88.53,53.78 89.01,54.26 94.87,54.26 95.68,55.07 95.68,55.79 95.27,56.2 94.54,56.2 93.8,56.95 93.8,57.38 94.19,57.76
  Bottom 0.2: IC1.10 96.88,66.76 v97.03,66.6 | 96.52,58.1 97.03,58.1 97.23,58.29 97.23,62.17 96.4,62.99 95.43,62.99 v95,63.43
  Bottom 0.305: IC1.9 IC1.10
ADC2_IN  (via drill 0.3)
  Top 0.152: RP1.40 89.37,53.09 89.77,53.09 90.02,53.35 90.02,55.84 90.04,55.84 v90.42,56.23
  Top 0.2: v89.41,62.39 89.53,62.26 v89.53,61.4
  Bottom 0.2: IC2.3 89.53,60.61 | 89.53,60.61 IC2.2 | 90.17,59.96 IC2.2 | v90.42,56.23 90.45,56.25 92.32,56.25 92.77,56.71 92.77,58.41 91.95,59.24 90.55,59.24 90.17,59.62 IC2.2 | v89.41,62.39 89.43,62.37 89.88,62.37 90,62.29 91.25,62.29 91.66,62.7 91.66,63.5 90.08,65.08 85.47,65.08 85.09,65.46 IC2.9 | v89.53,61.4 89.53,60.61
ADC_SEL1  (via drill 0.3)
  Top 0.2: 91.69,67.88 v90.17,67.88 | 91.69,67.88 91.69,68.76 92.68,69.75 94.08,69.75 v94.11,69.78 | 91.69,67.88 91.69,67.37 v92.36,67.37 | v94.92,58.87 94.9,58.87 94.9,58.24 RP1.16
  Bottom 0.2: IC1.13 100.33,69.02 98.93,70.41 94.74,70.41 v94.11,69.78 | v90.17,67.88 IC2.13 | v94.92,58.87 94.92,59.19 95.25,59.52 IC1.6 95.25,62.16 95.12,62.29 94.61,62.29 92.64,64.26 92.64,67.09 v92.36,67.37
ADC_SEL2  (via drill 0.3)
  Top 0.2: v94.61,71.56 94.61,69.56 94.23,69.18 v94.11,69.18 v94.1,69.18 94.01,69.27 92.71,69.27 92.46,69.02 92.46,68.24 v92.15,67.94 | RP1.31 89.97,56.59 v89.98,56.6 | v82.58,59.37 v82.58,59.36 v82.58,57.24
  Bottom 0.2: v94.11,69.18 94.11,68.38 98.55,68.38 99.06,67.88 IC1.12 | v92.15,67.94 92.44,67.94 92.96,67.41 92.96,64.45 94.74,62.67 96.27,62.67 96.52,62.41 IC1.5 | IC2.5 86.36,59.49 85.98,59.11 82.83,59.11 v82.58,59.37 81.21,59.37 78.49,62.09 78.49,70.92 79.88,72.32 93.85,72.32 v94.61,71.56 | v89.98,56.6 89.65,56.6 89.64,56.59 87.02,56.59 86.3,57.31 82.66,57.31 v82.58,57.24
ADC_SEL3  (via drill 0.3)
  Top 0.2: v90.68,56.92 90.6,57 90.23,57 89.83,57.39 RP1.29
  Bottom 0.2: IC2.6 85.09,61.74 85.31,61.96 86.69,61.96 87.07,61.57 87.07,59.5 87.21,59.37 87.56,59.37 88.02,58.91 88.63,58.91 88.91,59.19 90.05,59.19 90.63,58.6 91.81,58.6 92.45,57.97 92.45,57.14 91.88,56.58 91.02,56.58 v90.68,56.92
ANT
  Top 0.254: AN.SIG 47.05,123.37 47.82,123.37 50.67,120.52 L2.2 50.68,119.24 51.62,118.29 51.62,114.99 51.05,114.42 50.48,114.42 U10.11
B_OUT
  Top 0.508: U20.P16 24.73,31.94 | 24.73,31.94 24.73,31.92 25.38,32.58 U20.P15 | 24.73,31.94 23.13,31.94 19.37,35.7 15.33,35.7 13.51,37.52 AB.4
BAT1
  Top 0.254: 33.97,74.22 33.9,74.22 R57.2 | 37.58,76.33 R52.2
  Top 0.61: BAT1.1 39.75,78.48 D10.A 38.09,76.75 R52.2 37.68,77.53 37.1,78.11 35.21,78.11 33.97,76.87 Q3.P2 33.97,74.29 33.9,74.22 | 33.97,74.32 R57.2
BAT1_V  (via drill 0.35)
  Top 0.254: STM32F001.18 27.04,58.76 27.84,58.76 28.3,59.23 v28.3,59.56 | 37.84,74.22 v37.84,73.28 | v30.9,64.56 30.9,63.4 29.66,62.16
  Top 0.406: 29.66,62.16 v28.93,62.16
  Top 0.61: R52.1 35.85,76.2 35.85,76.08 37.68,74.25 R53.2 37.84,74.22
  Bottom 0.254: v28.93,62.16 28.76,62 28.76,62.2 28,61.44 28,59.86 v28.3,59.56 | v30.9,64.56 30.52,64.95 30.52,65.69 33.12,68.29 37.75,68.29 38.7,69.25 38.7,72.41 v37.84,73.28
BAT2  (via drill 0.3)
  Top 0.61: D11.A 47.94,76.81 47.94,79.3 48.55,79.91 48.85,79.91 BAT2.1 | R54.2 51.66,74.24 v52.6,74.24
  Bottom 0.61: BAT2.1 52.6,76.22 v52.6,74.24
BAT2_V  (via drill 0.35)